# Altium PCB MB979.PCBDOC
Units mil, origin at the board's own origin, x right, y up, seen from the top; angles counter-clockwise.
Board outline 2555 x 1405 mil, 2 copper layers (TopLayer, BottomLayer); 5 components, 96 nets, 192 pads, 0 vias.
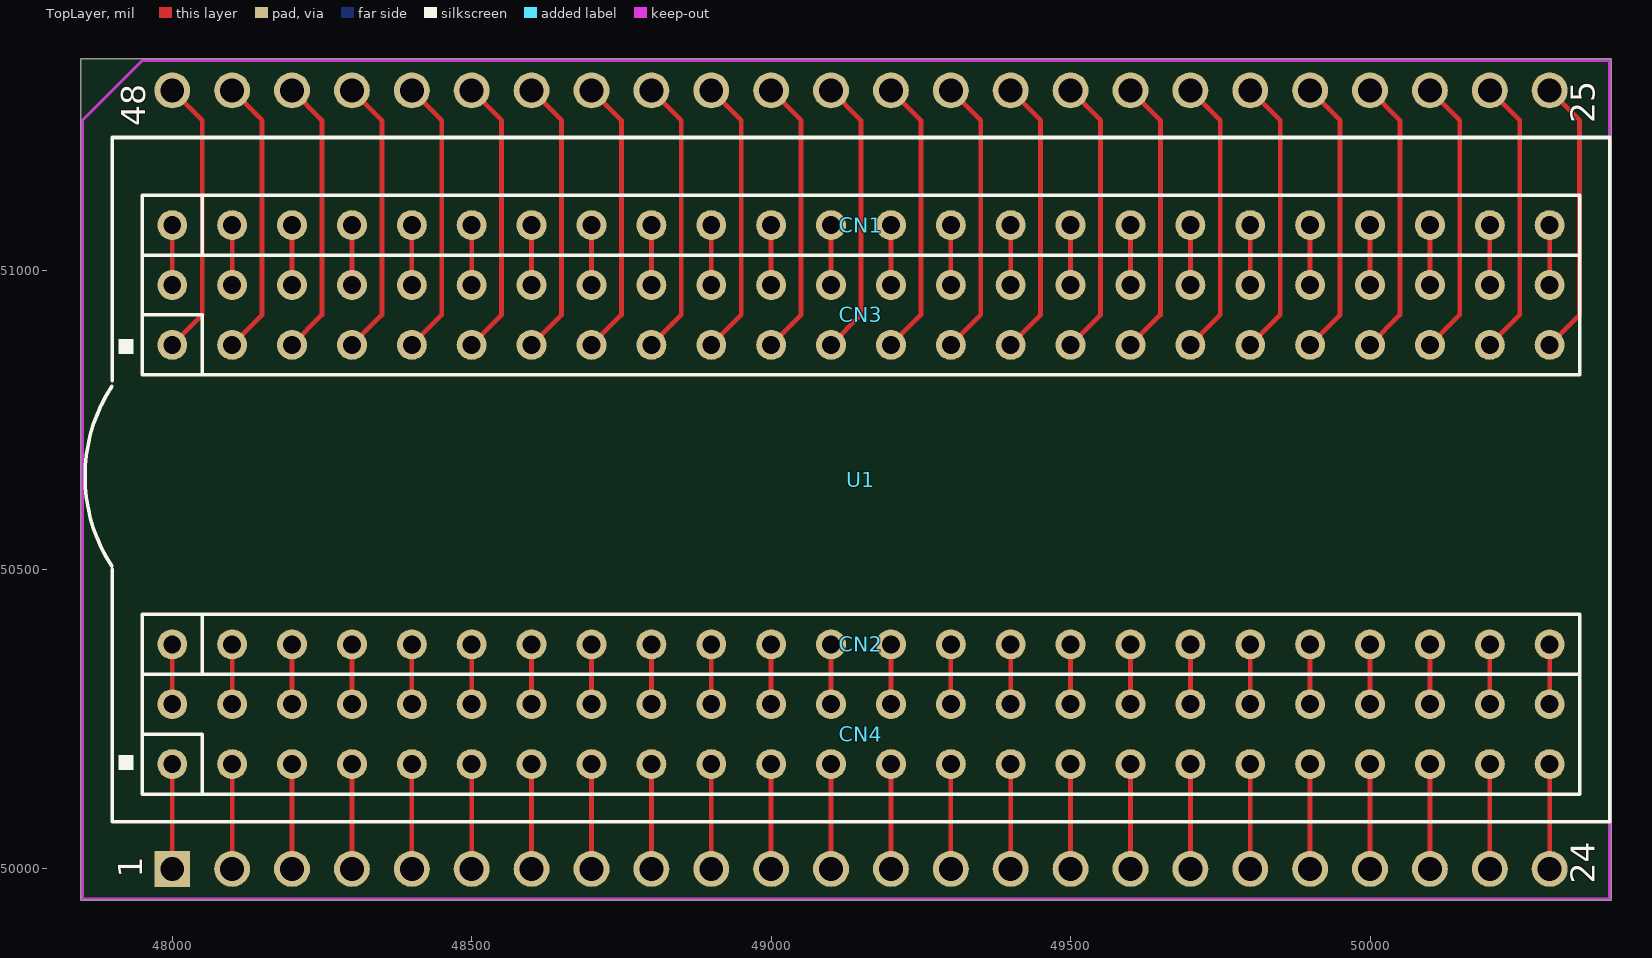
[diagram p0: TopLayer view]
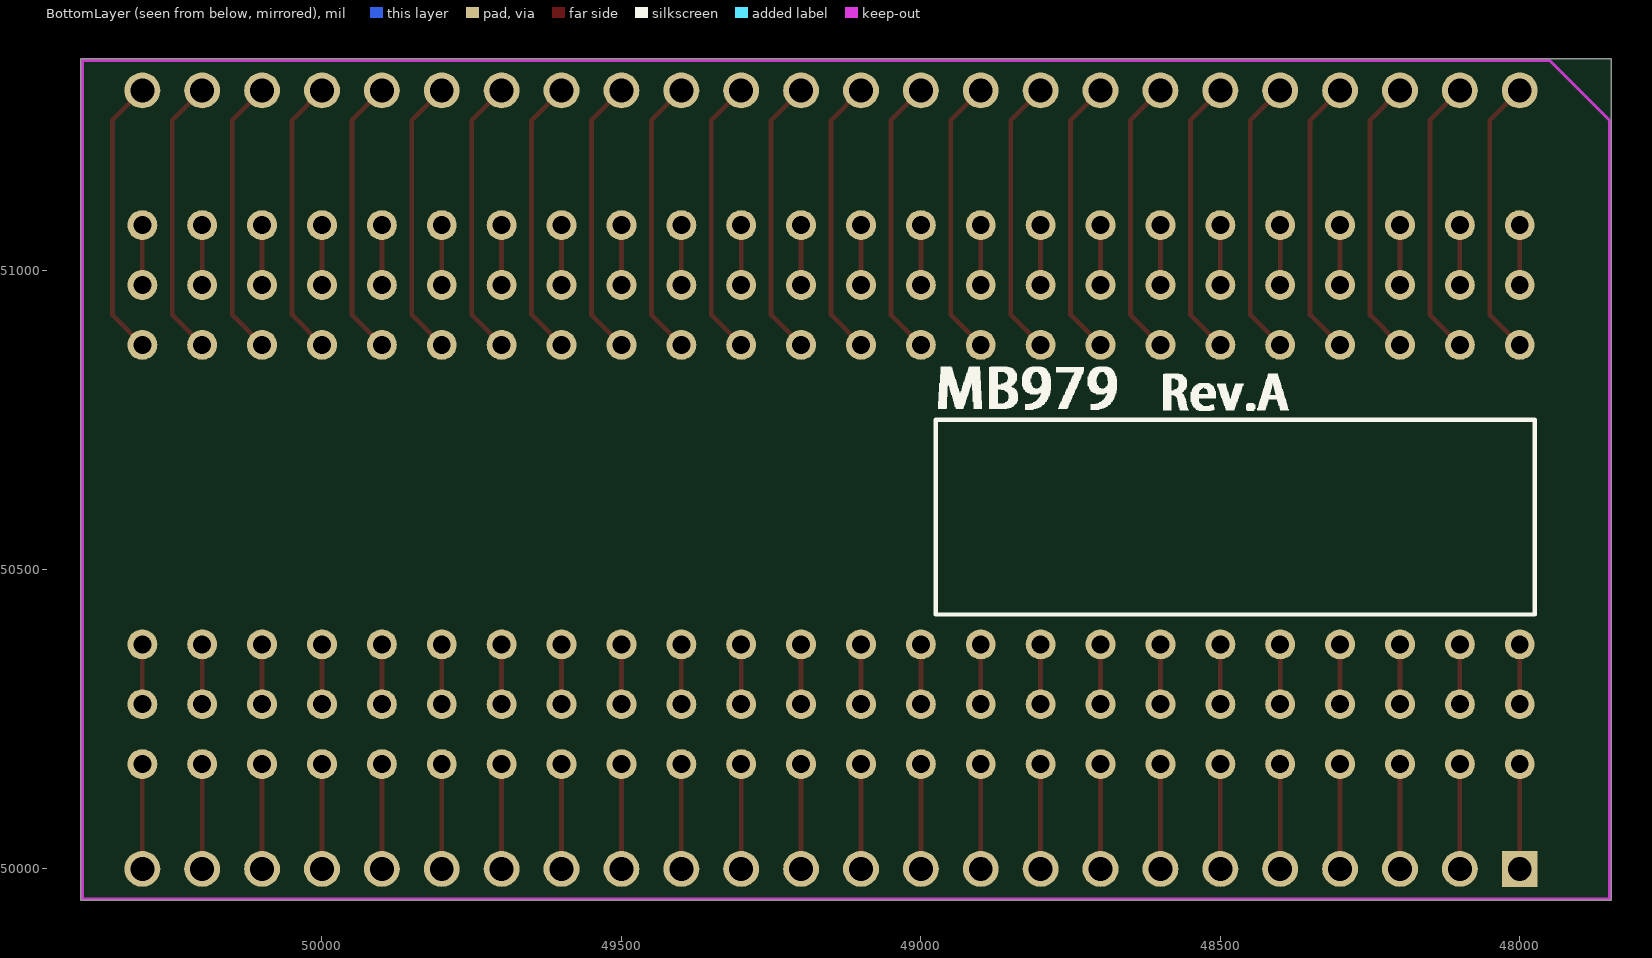
[diagram p1: BottomLayer view, seen from below]

## Layer stack, top to bottom
TopLayer: signal copper 1.4
Dielectric: dielectric 12.6, FR-4, Dk 4.8
BottomLayer: signal copper 1.4

## Board outline
47847.5,49947.5 50402.5,49947.5 50402.5,51352.5 47847.5,51352.5

## Design rules (kind name [scope] priority, off if disabled: settings)
Clearance Clearance_2 [(InPoly)] p1: gap=20
Clearance [All] p2: gap=7
ComponentClearance [All] p1 off: gap=10 collisioncheckmode=0 verticalgap=10
PolygonConnect [All] p1: connectstyle=Relief reliefconductorwidth=10 reliefentries=4 polygonreliefangle="90 Angle"
RoutingVias [All] p1: holewidth=16 width=25 viastyle="Through Hole" minholewidth=8 minwidth=16 maxholewidth=28 maxwidth=50
SolderMaskExpansion [All] p1: expansion=4
TestPointUsage [All] p1: valid=0 allowmultiple=FALSE
Testpoint [All] p1: side=15 testpointundercomponent=TRUE minsize=40 maxsize=100 preferedsize=60 minholesize=20 maxholesize=40 preferedholesize=32 testpointgrid=1 style=1023 order=0123456789
Width [All] p1: maxlimit=300 minlimit=8 preferedwidth=8
18 further rules are at their usual default settings.

## Components (designator, comment, footprint, x,y, rotation, side; value= is the part's Value field where it differs from the comment)
CN1 "Header 24" sip24 48000,51075 r0 top
CN2 "Header 24" sip24 48000,50375 r0 top
CN3 "Header 24X2" 2*24p 48000,50875 r90 top
CN4 "Header 24X2" 2*24p 48000,50175 r90 top
U1 "XHO5002B" XH05002 48000,50000 r0 top

## Footprints (in the part's own frame and the unit in brackets; to place one, negate y for a bottom-side part, rotate by r counter-clockwise, add the part's x,y. Pads: shape width x height; smd on the part's side, far side on the other; paste and mask are expansions set on the pad)
2*24p [mil]
  round 50 hole 30: 1(0,0) 2(100,0) 3(0,-100) 4(100,-100) 5(0,-200) 6(100,-200) 7(0,-300) 8(100,-300) 9(0,-400) 10(100,-400) 11(0,-500) 12(100,-500) 13(0,-600) 14(100,-600) 15(0,-700) 16(100,-700) 17(0,-800) 18(100,-800) 19(0,-900) 20(100,-900) 21(0,-1000) 22(100,-1000) 23(0,-1100) 24(100,-1100) 25(0,-1200) 26(100,-1200) 27(0,-1300) 28(100,-1300) 29(0,-1400) 30(100,-1400) 31(0,-1500) 32(100,-1500) 33(0,-1600) 34(100,-1600) 35(0,-1700) 36(100,-1700) 37(0,-1800) 38(100,-1800) 39(0,-1900) 40(100,-1900) 41(0,-2000) 42(100,-2000) 43(0,-2100) 44(100,-2100) 45(0,-2200) 46(100,-2200) 47(0,-2300) 48(100,-2300)
  silkscreen extent -50,-2350 150,50
sip24 [mil]
  round 50 hole 30: 1(0,0) 2(100,0) 3(200,0) 4(300,0) 5(400,0) 6(500,0) 7(600,0) 8(700,0) 9(800,0) 10(900,0) 11(1000,0) 12(1100,0) 13(1200,0) 14(1300,0) 15(1400,0) 16(1500,0) 17(1600,0) 18(1700,0) 19(1800,0) 20(1900,0) 21(2000,0) 22(2100,0) 23(2200,0) 24(2300,0)
  silkscreen extent -50,-50 2350,50
XH05002 [mil]
  rect 60x60 hole 40: 1(0,0)
  round 60 hole 40: 2(100,0) 3(200,0) 4(300,0) 5(400,0) 6(500,0) 7(600,0) 8(700,0) 9(800,0) 10(900,0) 11(1000,0) 12(1100,0) 13(1200,0) 14(1300,0) 15(1400,0) 16(1500,0) 17(1600,0) 18(1700,0) 19(1800,0) 20(1900,0) 21(2000,0) 22(2100,0) 23(2200,0) 24(2300,0) 25(2300,1300) 26(2200,1300) 27(2100,1300) 28(2000,1300) 29(1900,1300) 30(1800,1300) 31(1700,1300) 32(1600,1300) 33(1500,1300) 34(1400,1300) 35(1300,1300) 36(1200,1300) 37(1100,1300) 38(1000,1300) 39(900,1300) 40(800,1300) 41(700,1300) 42(600,1300) 43(500,1300) 44(400,1300) 45(300,1300) 46(200,1300) 47(100,1300) 48(0,1300)
  silkscreen extent -146,79 2400,1221

## Nets (pads, with @x,y where several pads share a name; then routed paths per layer and width w, separated by ;. In a path a pad name is that pad's centre, name@x,y a point inside that pad or via, vN(x,y) a via of type N, cw(c..) or ccw(c..) an arc to the next point about the centre after c; other vN are vias at no path point)
LCD_1: CN4.1 U1.1 | length 175
  TopLayer w8: U1.1 CN4.1
LCD_2: CN4.3 U1.2 | length 175
  TopLayer w8: U1.2 CN4.3
LCD_3: CN4.5 U1.3 | length 175
  TopLayer w8: U1.3 CN4.5
LCD_4: CN4.7 U1.4 | length 175
  TopLayer w8: U1.4 CN4.7
LCD_5: CN4.9 U1.5 | length 175
  TopLayer w8: U1.5 CN4.9
LCD_6: CN4.11 U1.6 | length 175
  TopLayer w8: U1.6 CN4.11
LCD_7: CN4.13 U1.7 | length 175
  TopLayer w8: U1.7 CN4.13
LCD_8: CN4.15 U1.8 | length 175
  TopLayer w8: U1.8 CN4.15
LCD_9: CN4.17 U1.9 | length 175
  TopLayer w8: U1.9 CN4.17
LCD_10: CN4.19 U1.10 | length 175
  TopLayer w8: U1.10 CN4.19
LCD_11: CN4.21 U1.11 | length 175
  TopLayer w8: U1.11 CN4.21
LCD_12: CN4.23 U1.12 | length 175
  TopLayer w8: U1.12 CN4.23
LCD_13: CN4.25 U1.13 | length 175
  TopLayer w8: U1.13 CN4.25
LCD_14: CN4.27 U1.14 | length 175
  TopLayer w8: U1.14 CN4.27
LCD_15: CN4.29 U1.15 | length 175
  TopLayer w8: U1.15 CN4.29
LCD_16: CN4.31 U1.16 | length 185
  TopLayer w8: U1.16@49500,49990 CN4.31
LCD_17: CN4.33 U1.17 | length 175
  TopLayer w8: U1.17 CN4.33
LCD_18: CN4.35 U1.18 | length 175
  TopLayer w8: U1.18 CN4.35
LCD_19: CN4.37 U1.19 | length 175
  TopLayer w8: U1.19 CN4.37
LCD_20: CN4.39 U1.20 | length 175
  TopLayer w8: U1.20 CN4.39
LCD_21: CN4.41 U1.21 | length 175
  TopLayer w8: U1.21 CN4.41
LCD_22: CN4.43 U1.22 | length 175
  TopLayer w8: U1.22 CN4.43
LCD_23: CN4.45 U1.23 | length 175
  TopLayer w8: U1.23 CN4.45
LCD_24: CN4.47 U1.24 | length 175
  TopLayer w8: U1.24 CN4.47
NetCN1_1: CN1.1 CN3.2 | length 100
  TopLayer w8: CN3.2 CN1.1
NetCN1_2: CN1.2 CN3.4 | length 100
  TopLayer w8: CN3.4 CN1.2
NetCN1_3: CN1.3 CN3.6 | length 100
  TopLayer w8: CN3.6 CN1.3
NetCN1_4: CN1.4 CN3.8 | length 100
  TopLayer w8: CN3.8 CN1.4
NetCN1_5: CN1.5 CN3.10 | length 100
  TopLayer w8: CN3.10 CN1.5
NetCN1_6: CN1.6 CN3.12 | length 100
  TopLayer w8: CN3.12 CN1.6
NetCN1_7: CN1.7 CN3.14 | length 100
  TopLayer w8: CN3.14 CN1.7
NetCN1_8: CN1.8 CN3.16 | length 100
  TopLayer w8: CN3.16 CN1.8
NetCN1_9: CN1.9 CN3.18 | length 100
  TopLayer w8: CN3.18 CN1.9
NetCN1_10: CN1.10 CN3.20 | length 100
  TopLayer w8: CN3.20 CN1.10
NetCN1_11: CN1.11 CN3.22 | length 100
  TopLayer w8: CN3.22 CN1.11
NetCN1_12: CN1.12 CN3.24 | length 100
  TopLayer w8: CN3.24 CN1.12
NetCN1_13: CN1.13 CN3.26 | length 100
  TopLayer w8: CN3.26 CN1.13
NetCN1_14: CN1.14 CN3.28 | length 100
  TopLayer w8: CN3.28 CN1.14
NetCN1_15: CN1.15 CN3.30 | length 100
  TopLayer w8: CN3.30 CN1.15
NetCN1_16: CN1.16 CN3.32 | length 100
  TopLayer w8: CN3.32 CN1.16
NetCN1_17: CN1.17 CN3.34 | length 100
  TopLayer w8: CN3.34 CN1.17
NetCN1_18: CN1.18 CN3.36 | length 100
  TopLayer w8: CN3.36 CN1.18
NetCN1_19: CN1.19 CN3.38 | length 100
  TopLayer w8: CN3.38 CN1.19
NetCN1_20: CN1.20 CN3.40 | length 100
  TopLayer w8: CN3.40 CN1.20
NetCN1_21: CN1.21 CN3.42 | length 100
  TopLayer w8: CN3.42 CN1.21
NetCN1_22: CN1.22 CN3.44 | length 100
  TopLayer w8: CN3.44 CN1.22
NetCN1_23: CN1.23 CN3.46 | length 100
  TopLayer w8: CN3.46 CN1.23
NetCN1_24: CN1.24 CN3.48 | length 100
  TopLayer w8: CN3.48 CN1.24
NetCN2_1: CN2.1 CN4.2 | length 100
  TopLayer w8: CN4.2 CN2.1
NetCN2_2: CN2.2 CN4.4 | length 100
  TopLayer w8: CN4.4 CN2.2
NetCN2_3: CN2.3 CN4.6 | length 100
  TopLayer w8: CN4.6 CN2.3
NetCN2_4: CN2.4 CN4.8 | length 100
  TopLayer w8: CN4.8 CN2.4
NetCN2_5: CN2.5 CN4.10 | length 100
  TopLayer w8: CN4.10 CN2.5
NetCN2_6: CN2.6 CN4.12 | length 100
  TopLayer w8: CN4.12 CN2.6
NetCN2_7: CN2.7 CN4.14 | length 100
  TopLayer w8: CN4.14 CN2.7
NetCN2_8: CN2.8 CN4.16 | length 100
  TopLayer w8: CN4.16 CN2.8
NetCN2_9: CN2.9 CN4.18 | length 100
  TopLayer w8: CN4.18 CN2.9
NetCN2_10: CN2.10 CN4.20 | length 100
  TopLayer w8: CN4.20 CN2.10
NetCN2_11: CN2.11 CN4.22 | length 100
  TopLayer w8: CN4.22 CN2.11
NetCN2_12: CN2.12 CN4.24 | length 100
  TopLayer w8: CN4.24 CN2.12
NetCN2_13: CN2.13 CN4.26 | length 100
  TopLayer w8: CN4.26 CN2.13
NetCN2_14: CN2.14 CN4.28 | length 100
  TopLayer w8: CN4.28 CN2.14
NetCN2_15: CN2.15 CN4.30 | length 100
  TopLayer w8: CN4.30 CN2.15
NetCN2_16: CN2.16 CN4.32 | length 100
  TopLayer w8: CN4.32 CN2.16
NetCN2_17: CN2.17 CN4.34 | length 100
  TopLayer w8: CN4.34 CN2.17
NetCN2_18: CN2.18 CN4.36 | length 100
  TopLayer w8: CN4.36 CN2.18
NetCN2_19: CN2.19 CN4.38 | length 100
  TopLayer w8: CN4.38 CN2.19
NetCN2_20: CN2.20 CN4.40 | length 100
  TopLayer w8: CN4.40 CN2.20
NetCN2_21: CN2.21 CN4.42 | length 100
  TopLayer w8: CN4.42 CN2.21
NetCN2_22: CN2.22 CN4.44 | length 100
  TopLayer w8: CN4.44 CN2.22
NetCN2_23: CN2.23 CN4.46 | length 100
  TopLayer w8: CN4.46 CN2.23
NetCN2_24: CN2.24 CN4.48 | length 100
  TopLayer w8: CN4.48 CN2.24
NetCN3_1: CN3.1 U1.48 | length 466.4
  TopLayer w8: CN3.1 48050,50925 48050,51250 U1.48
NetCN3_3: CN3.3 U1.47 | length 466.4
  TopLayer w8: CN3.3 48150,50925 48150,51250 U1.47
NetCN3_5: CN3.5 U1.46 | length 466.4
  TopLayer w8: CN3.5 48250,50925 48250,51250 U1.46
NetCN3_7: CN3.7 U1.45 | length 466.4
  TopLayer w8: CN3.7 48350,50925 48350,51250 U1.45
NetCN3_9: CN3.9 U1.44 | length 466.4
  TopLayer w8: CN3.9 48450,50925 48450,51250 U1.44
NetCN3_11: CN3.11 U1.43 | length 466.4
  TopLayer w8: CN3.11 48550,50925 48550,51250 U1.43
NetCN3_13: CN3.13 U1.42 | length 466.4
  TopLayer w8: CN3.13 48650,50925 48650,51250 U1.42
NetCN3_15: CN3.15 U1.41 | length 466.4
  TopLayer w8: CN3.15 48750,50925 48750,51250 U1.41
NetCN3_17: CN3.17 U1.40 | length 466.4
  TopLayer w8: CN3.17 48850,50925 48850,51250 U1.40
NetCN3_19: CN3.19 U1.39 | length 466.4
  TopLayer w8: CN3.19 48950,50925 48950,51250 U1.39
NetCN3_21: CN3.21 U1.38 | length 466.4
  TopLayer w8: CN3.21 49050,50925 49050,51250 U1.38
NetCN3_23: CN3.23 U1.37 | length 466.4
  TopLayer w8: CN3.23 49150,50925 49150,51250 U1.37
NetCN3_25: CN3.25 U1.36 | length 466.4
  TopLayer w8: CN3.25 49250,50925 49250,51250 U1.36
NetCN3_27: CN3.27 U1.35 | length 466.4
  TopLayer w8: CN3.27 49350,50925 49350,51250 U1.35
NetCN3_29: CN3.29 U1.34 | length 466.4
  TopLayer w8: CN3.29 49450,50925 49450,51250 U1.34
NetCN3_31: CN3.31 U1.33 | length 466.4
  TopLayer w8: CN3.31 49550,50925 49550,51250 U1.33
NetCN3_33: CN3.33 U1.32 | length 466.4
  TopLayer w8: CN3.33 49650,50925 49650,51250 U1.32
NetCN3_35: CN3.35 U1.31 | length 466.4
  TopLayer w8: CN3.35 49750,50925 49750,51250 U1.31
NetCN3_37: CN3.37 U1.30 | length 466.4
  TopLayer w8: CN3.37 49850,50925 49850,51250 U1.30
NetCN3_39: CN3.39 U1.29 | length 466.4
  TopLayer w8: CN3.39 49950,50925 49950,51250 U1.29
NetCN3_41: CN3.41 U1.28 | length 466.4
  TopLayer w8: CN3.41 50050,50925 50050,51250 U1.28
NetCN3_43: CN3.43 U1.27 | length 466.4
  TopLayer w8: CN3.43 50150,50925 50150,51250 U1.27
NetCN3_45: CN3.45 U1.26 | length 466.4
  TopLayer w8: CN3.45 50250,50925 50250,51250 U1.26
NetCN3_47: CN3.47 U1.25 | length 466.4
  TopLayer w8: CN3.47 50350,50925 50350,51250 U1.25

## Keep-outs
KeepOutLayer:
  lines w5: 47850,49950 47850,51250 47950,51350 50400,51350 50400,49950 47850,49950

## Silkscreen, mask and mechanical layers (free items; w line width, h text height)
TopOverlay:
  rectangle: 47910,50165 47935,50190
  rectangle: 47910,50860 47935,50885
  text "25" at 50375,51245 h40 r90
  text "48" at 47955,51240 h40 r90
  text "1" at 47950,49985 h40 r90
  text "24" at 50375,49975 h40 r90
BottomOverlay:
  drawing of 953 lines, arcs and shapes, not listed
Mechanical1:
  lines w5: 47850,49950 47850,51250 47950,51350 50400,51350 50400,49950 47850,49950